# Altium PCB qfc_Alfa2.0.PcbDoc
Units mil, origin at the board's own origin, x right, y up, seen from the top; angles counter-clockwise.
Board outline 6000 x 4000 mil, 2 copper layers (Top Layer, Bottom Layer); 137 components, 138 nets, 616 pads, 0 vias.
Unrouted connection lines stored in the file: 431.
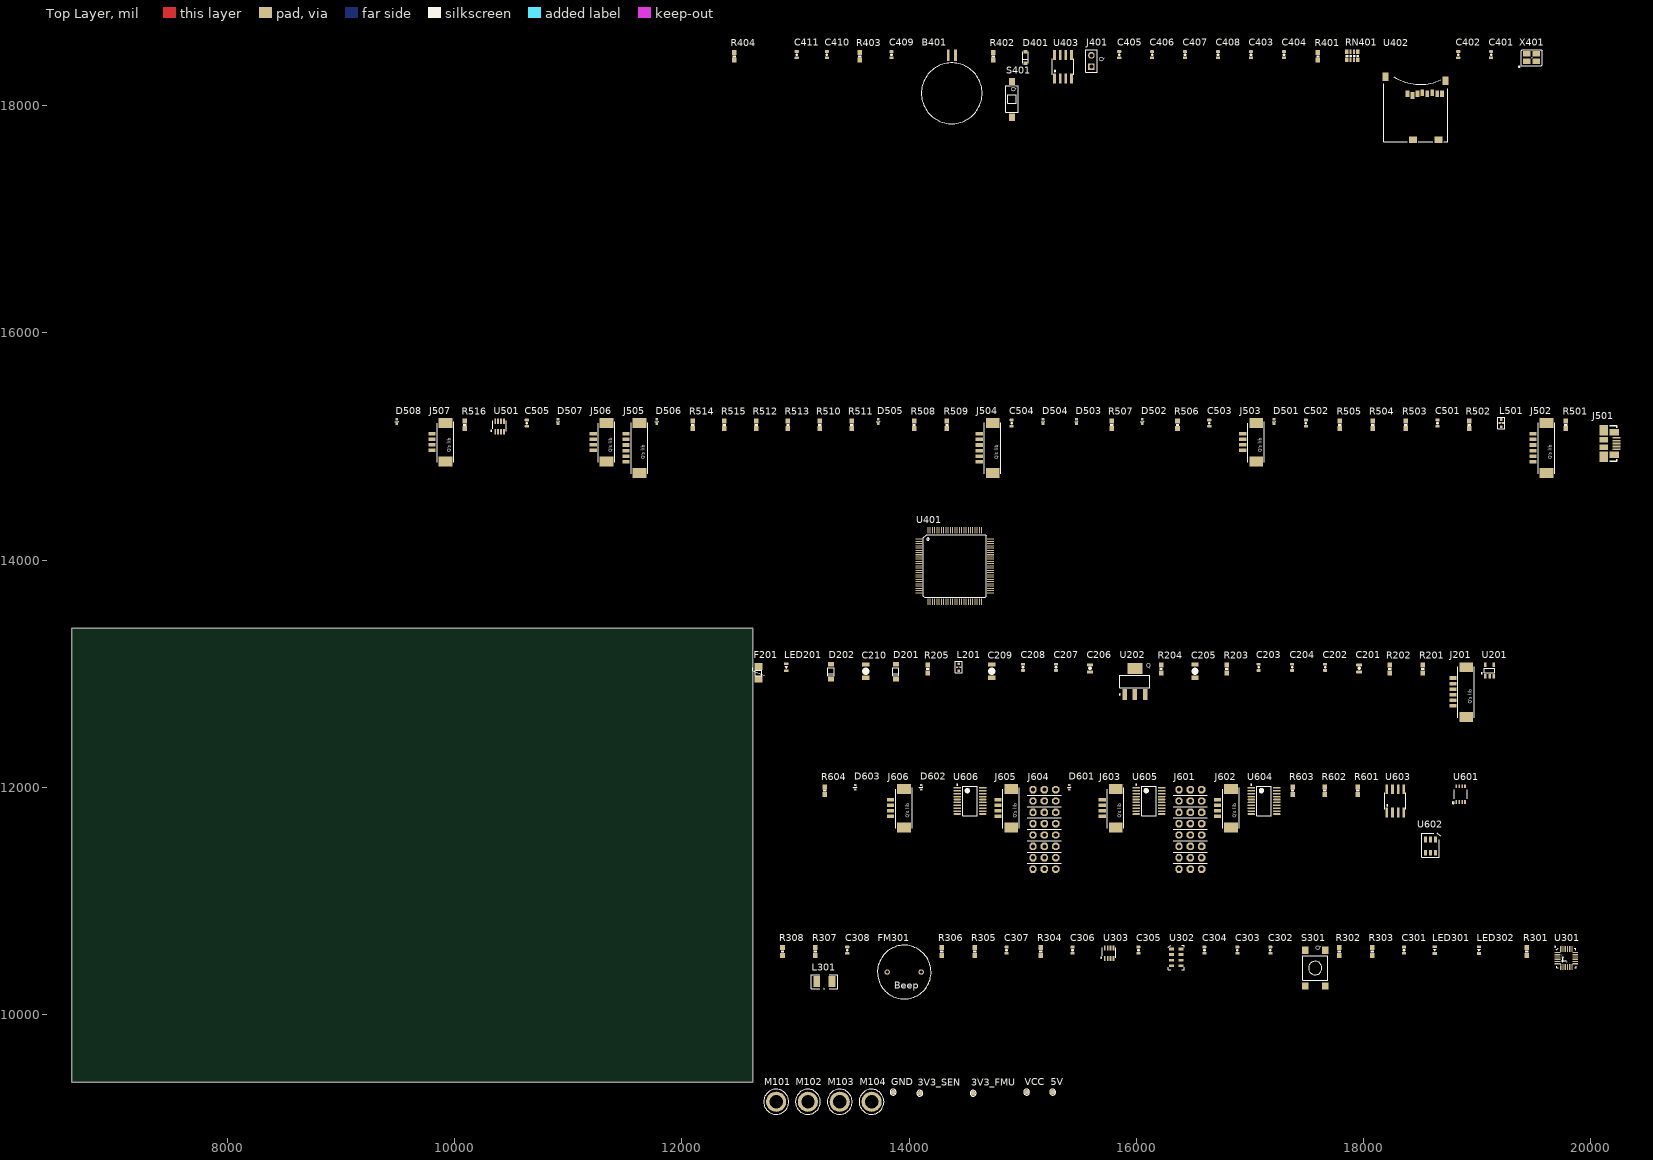
[diagram p0: Top Layer view]
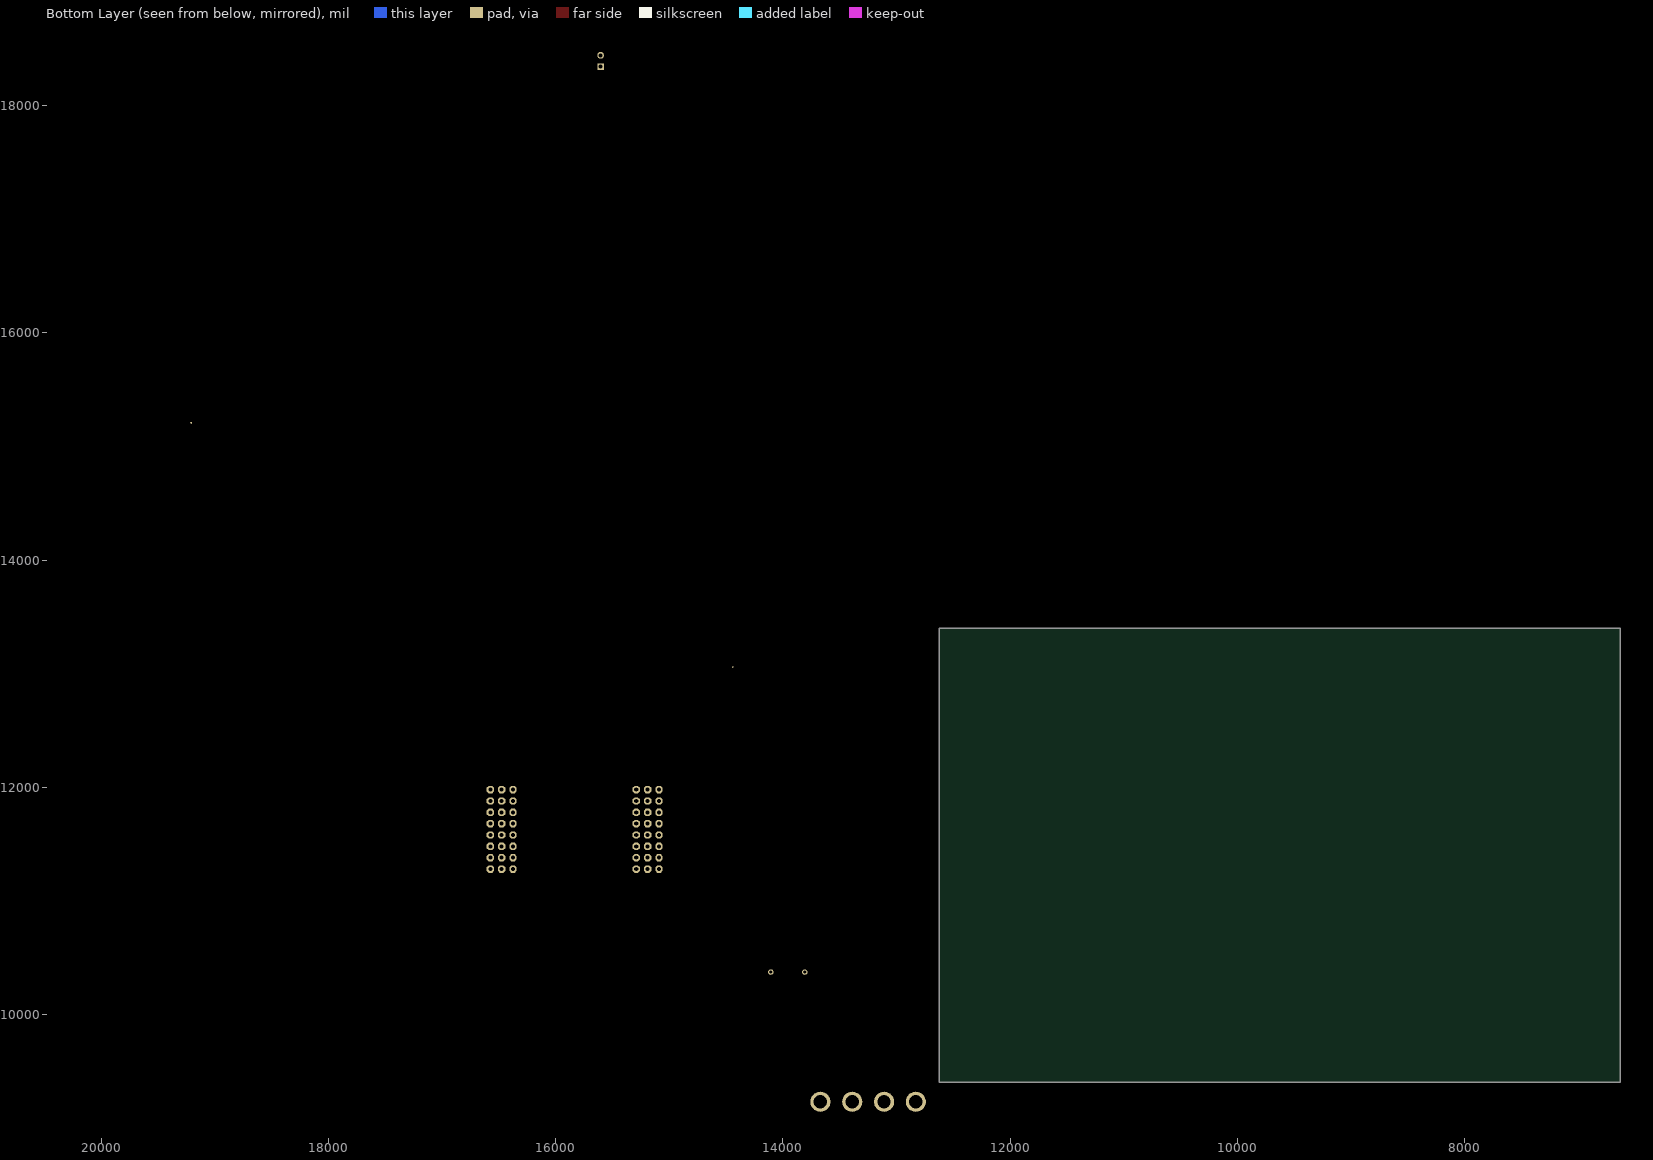
[diagram p1: Bottom Layer view, seen from below]

## Layer stack, top to bottom
Top Layer: signal copper 1.4
Dielectric: dielectric 12.6, FR-4, Dk 4.8
Bottom Layer: signal copper 1.4

## Board outline
6625,9400 12625,9400 12625,13400 6625,13400

## Design rules (kind name [scope] priority, off if disabled: settings)
Clearance [All] p1: gap=10
HoleSize [All] p1: absolutevalues=TRUE maxlimit=137.8 minlimit=1 maxpercent=80.000 minpercent=20.000
MinimumSolderMaskSliver [All] p1: minsoldermaskwidth=0
PolygonConnect [All] p1: connectstyle=Relief reliefconductorwidth=10 reliefentries=4 polygonreliefangle="90 Angle"
RoomDefinition U_sensors [InComponentClass('U_sensors')] p1: confinementstyle=ConfineIn formatcopy=TRUE lockcomponents=FALSE outline 12841,10125 19911,10125 19911,10719 12841,10719
RoomDefinition U_power [InComponentClass('U_power')] p2: confinementstyle=ConfineIn formatcopy=TRUE lockcomponents=FALSE outline 12614,12561 19259,12561 19259,13211 12614,13211
RoomDefinition U_con_3V3-5V [InComponentClass('U_con_3V3-5V')] p3: confinementstyle=ConfineIn formatcopy=TRUE lockcomponents=FALSE outline 13212,11224 19007,11224 19007,12139 13212,12139
RoomDefinition U_con_3V3 [InComponentClass('U_con_3V3')] p4: confinementstyle=ConfineIn formatcopy=TRUE lockcomponents=FALSE outline 9464,14711 20439,14711 20439,15361 9464,15361
RoomDefinition top [InComponentClass('top')] p5: confinementstyle=ConfineIn formatcopy=TRUE lockcomponents=FALSE outline 12705,9035 15365,9035 15365,9450 12705,9450
RoutingVias [All] p1: holewidth=28 width=50 viastyle="Through Hole" minholewidth=28 minwidth=50 maxholewidth=28 maxwidth=50
SilkscreenOverComponentPads [All] p1: minsilkscreentomaskgap=2
SolderMaskExpansion [All] p1: expansion=4
Width [All] p1: maxlimit=80 minlimit=10 preferedwidth=12
25 further rules are at their usual default settings.

## Classes and differential pairs
component class U_sensors: C301 C302 C303 C304 C305 C306 C307 C308 FM301 L301 LED301 LED302 R301 R302 R303 R304 R305 R306 R307 R308 S301 U301 U302 U303
component class U_power: C201 C202 C203 C204 C205 C206 C207 C208 C209 C210 D201 D202 F201 J201 L201 LED201 R201 R202 R203 R204 R205 U201 U202
component class U_fmu: B401 C401 C402 C403 C404 C405 C406 C407 C408 C409 C410 C411 D401 J401 R401 R402 R403 R404 RN401 S401 U401 U402 U403 X401
component class U_con_3V3: C501 C502 C503 C504 C505 D501 D502 D503 D504 D505 D506 D507 D508 J501 J502 J503 J504 J505 J506 J507 L501 R501 R502 R503 R504 R505 R506 R507 R508 R509 R510 R511 R512 R513 R514 R515 R516 U501
component class U_con_3V3-5V: D601 D602 D603 J601 J602 J603 J604 J605 J606 R601 R602 R603 R604 U601 U602 U603 U604 U605 U606
component class top: 3V3_FMU 3V3_SEN 5V GND M101 M102 M103 M104 VCC

## Components (designator, comment, footprint, x,y, rotation, side; value= is the part's Value field where it differs from the comment)
3V3_FMU "TEST" PAD.04X.04 14565,9305 r90 top
3V3_SEN "TEST" PAD.04X.04 14095,9305 r90 top
5V "TEST" PAD.04X.04 15265,9315 r0 top
B401 "MS621FE" MS621FE 14376,18110 r90 top
C201 "10u" 0805-CAP 17964,13046 r90 top
C202 "0u1" 0603-CAP 17664,13056 r90 top
C203 "10n" 0603-CAP 17079,13056 r90 top
C204 "0u1" 0603-CAP 17374,13056 r90 top
C205 "100u" 1206-CAP 16519,13021 r90 top
C206 "10u" 0805-CAP 15594,13046 r90 top
C207 "0u1" 0603-CAP 15294,13056 r90 top
C208 "0u1" 0603-CAP 15004,13056 r90 top
C209 "100u" 1206-CAP 14729,13021 r90 top
C210 "100u" 1206-CAP 13619,13021 r90 top
C301 "10n" 0603-CAP 18359,10565 r90 top
C302 "2u2" 0603-CAP 17182,10565 r90 top
C303 "0u1" 0603-CAP 16891,10565 r90 top
C304 "2u2" 0603-CAP 16601,10565 r90 top
C305 "0u1" 0603-CAP 16020,10565 r90 top
C306 "2u2" 0603-CAP 15440,10565 r90 top
C307 "0.47uF" 0603-CAP 14859,10565 r90 top
C308 "10n" 0603-CAP 13456,10565 r90 top
C401 "8pF" 0603-CAP 19126,18450 r90 top
C402 "8pF" 0603-CAP 18836,18450 r90 top
C403 "2u2" 0603-CAP 17011,18450 r90 top
C404 "2u2" 0603-CAP 17301,18450 r90 top
C405 "0u1" 0603-CAP 15851,18450 r90 top
C406 "0u1" 0603-CAP 16141,18450 r90 top
C407 "0u1" 0603-CAP 16431,18450 r90 top
C408 "0u1" 0603-CAP 16721,18450 r90 top
C409 "0u1" 0603-CAP 13846,18450 r90 top
C410 "0u1" 0603-CAP 13276,18450 r90 top
C411 "0u1" 0603-CAP 13011,18450 r90 top
C501 "0u1" 0603-CAP 18654,15206 r90 top
C502 "0u1" 0603-CAP 17494,15206 r90 top
C503 "0u1" 0603-CAP 16644,15206 r90 top
C504 "0u1" 0603-CAP 14904,15206 r90 top
C505 "0u1" 0603-CAP 10634,15206 r90 top
D201 "MBR120VLSFT3GOSCT" SOD-123LF 13884,13081 r90 top
D202 "MMSZ5233BT1G" SOD-123LF 13314,13081 r90 top
D401 "RB751V40T1G" SOD-323 15026,18425 r90 top
D501 "PESD0603-140" 0603-ESD 17214,15221 r90 top
D502 "PESD0603-140" 0603-ESD 16054,15221 r90 top
D503 "PESD0603-140" 0603-ESD 15474,15221 r90 top
D504 "PESD0603-140" 0603-ESD 15179,15221 r90 top
D505 "PESD0603-140" 0603-ESD 13729,15221 r90 top
D506 "PESD0603-140" 0603-ESD 11779,15221 r90 top
D507 "PESD0603-140" 0603-ESD 10909,15221 r90 top
D508 "PESD0603-140" 0603-ESD 9489,15221 r90 top
D601 "PESD0603-140" 0603-ESD 15412,11999 r90 top
D602 "PESD0603-140" 0603-ESD 14107,11999 r90 top
D603 "PESD0603-140" 0603-ESD 13527,11999 r90 top
F201 "0ZCA0035FF2G" 1206-FUSE 12674,13006 r90 top
FM301 "BEEP" BEEP-12mm 13733,10397 r0 top
GND "TEST" PAD.04X.04 13860,9315 r90 top
J201 "GH1.25-6P" 1.25-6P 18789,13011 r90 top
J401 "HDR 2X1" HDR2X1 15606,18345 r90 top
J501 "47346-0001" MOLEX-47346-0001 20119,15026 r0 top
J502 "GH1.25-6P" 1.25-6P 19494,15161 r90 top
J503 "GH1.25-4P" 1.25-4P 16939,15261 r90 top
J504 "GH1.25-6P" 1.25-6P 14619,15161 r90 top
J505 "GH1.25-6P" 1.25-6P 11509,15161 r90 top
J506 "GH1.25-4P" 1.25-4P 11219,15261 r90 top
J507 "GH1.25-4P" 1.25-4P 9799,15261 r90 top
J601 "JR 3X8" JR3X8 16577,11279 r90 top
J602 "GH1.25-4P" 1.25-4P 16717,12039 r90 top
J603 "GH1.25-4P" 1.25-4P 15702,12039 r90 top
J604 "JR 3X8" JR3X8 15292,11279 r90 top
J605 "GH1.25-4P" 1.25-4P 14782,12039 r90 top
J606 "GH1.25-4P" 1.25-4P 13837,12039 r90 top
L201 "KNH16C104DA5TS" 0603-KNH16-DA 14439,13056 r90 top
L301 "47uH" "1210 - IND" 13320,10380 r180 top
L501 "KNH16C104DA5TS" 0603-KNH16-DA 19214,15206 r90 top
LED201 "APG1608CGKC" 0603-LED 12919,13056 r90 top
LED301 "APT1608SECK" 0603-LED 18629,10565 r90 top
LED302 "APT1608QBC/G" 0603-LED 19019,10565 r90 top
M101 "MOUNT-HOLE3MM" HOLE-3mm 12830,9230 r0 top
M102 "MOUNT-HOLE3MM" HOLE-3mm 13110,9230 r0 top
M103 "MOUNT-HOLE3MM" HOLE-3mm 13390,9230 r0 top
M104 "MOUNT-HOLE3MM" HOLE-3mm 13670,9230 r0 top
R201 "10K 0.1%" 0603-RES 18524,13041 r90 top
R202 "10K 0.1%" 0603-RES 18234,13041 r90 top
R203 "10K 0.1%" 0603-RES 16799,13041 r90 top
R204 "10K 0.1%" 0603-RES 16219,13041 r90 top
R205 "1K" 0603-RES 14164,13041 r90 top
R301 "10K" 0603-RES 19439,10553 r90 top
R302 "220R" 0603-RES 17788,10553 r90 top
R303 "220R" 0603-RES 18078,10553 r90 top
R304 "16K5" 0603-RES 15159,10553 r90 top
R305 "453K" 0603-RES 14579,10553 r90 top
R306 "9K09" 0603-RES 14289,10553 r90 top
R307 "10K" 0603-RES 13176,10553 r90 top
R308 "100K" 0603-RES 12886,10553 r90 top
R401 "10K" 0603-RES 17601,18435 r90 top
R402 "10K" 0603-RES 14741,18435 r90 top
R403 "1K" 0603-RES 13566,18435 r90 top
R404 "10K" 0603-RES 12461,18435 r90 top
R501 "0R" 0603-RES 19784,15191 r90 top
R502 "10K" 0603-RES 18934,15191 r90 top
R503 "22R" 0603-RES 18374,15191 r90 top
R504 "10K" 0603-RES 18084,15191 r90 top
R505 "22R" 0603-RES 17794,15191 r90 top
R506 "120R" 0603-RES 16364,15191 r90 top
R507 "120R" 0603-RES 15784,15191 r90 top
R508 "10K 0.1%" 0603-RES 14044,15191 r90 top
R509 "10K 0.1%" 0603-RES 14334,15191 r90 top
R510 "10K 0.1%" 0603-RES 13214,15191 r90 top
R511 "10K 0.1%" 0603-RES 13494,15191 r90 top
R512 "10K 0.1%" 0603-RES 12654,15191 r90 top
R513 "10K 0.1%" 0603-RES 12934,15191 r90 top
R514 "10K 0.1%" 0603-RES 12094,15191 r90 top
R515 "10K 0.1%" 0603-RES 12374,15191 r90 top
R516 "120R" 0603-RES 10089,15191 r90 top
R601 "220R" 0603-RES 17952,11969 r90 top
R602 "220R" 0603-RES 17662,11969 r90 top
R603 "220R" 0603-RES 17377,11969 r90 top
R604 "10K" 0603-RES 13257,11969 r90 top
RN401 "10K" 0603*4 17856,18405 r90 top
S301 "SWITCH" SW_6*6 17571,10422 r90 top
S401 "轻触开关 贴片3*6*2.5mm" SMD-SWITCH-2P 14819,18058 r90 top
U201 "TPS79133" R-PDSO-G5 19449,12716 r0 top
U202 "LM1117S-3.3" SOT223-4N 15989,12931 r0 top
U301 "MPU-6000" QFN-24 19788,10495 r0 top
U302 "MS5611-01BA" MS5611-01BA 16353,10501 r0 top
U303 "LT3469" SOT23-8 15762,10537 r0 top
U401 "STM32F427VI qfp 100 pin" LQFP100 14403,13948 r0 top
U402 "2908-05WB-MG" MICROSD 18466,18000 r0 top
U403 "RAM-FM25V01" SO08 15356,18345 r0 top
U501 "3.3-V CAN TRANSCEIVER" SOT23-8 10394,15176 r0 top
U601 "Dual inverter tri-state, 3.3V/5V" TSSOP8_SOT505-2 18857,11939 r0 top
U602 "LRTB GFTG-T7AW-1+V7A7-29+R5T9-49-L" P-LCC-6 18580,11480 r90 top
U603 "TM1803" SO08 18282,11879 r0 top
U604 "TXS0108EPWR" SOP65P640-20N 17127,11879 r0 top
U605 "TXS0108EPWR" SOP65P640-20N 16112,11879 r0 top
U606 "TXS0108EPWR" SOP65P640-20N 14537,11879 r0 top
VCC "TEST" PAD.04X.04 15035,9315 r90 top
X401 "Crystal Oscillator in 3.2x2.5 SMD" 3225-OSC 19481,18425 r0 top

## Footprints (in the part's own frame and the unit in brackets; to place one, negate y for a bottom-side part, rotate by r counter-clockwise, add the part's x,y. Pads: shape width x height; smd on the part's side, far side on the other; paste and mask are expansions set on the pad)
1.25-4P [mm]
  rect 0.8x1.6 smd: 1(-7.5,0) 2(-6.25,0) 3(-5,0) 4(-3.75,0)
  rect 2.2x3.1 smd: GND(-9.982,-2.997) GND(-1.4,-3)
  silkscreen extent -10.16,-4.83 -1.14,-1.14
1.25-6P [mm]
  rect 0.8x1.6 smd: 1(-7.5,0) 2(-6.25,0) 3(-5,0) 4(-3.75,0) 5(-2.5,0) 6(-1.25,0)
  rect 2.2x3.1 smd: GND(-9.982,-2.997) GND(1.15,-3)
  silkscreen extent -10.16,-4.83 1.27,-1.14
0603*4 [mm] "Res Array 0603*4"
  rect 1.016x0.8 smd: 1(0,0) 4(0,-2.4) 5(1.778,-2.4) 8(1.778,0)
  rect 1.016x0.5 smd: 2(0,-0.8) 3(0,-1.6) 6(1.778,-1.6) 7(1.778,-0.8)
  silkscreen extent 0.66,-2.74 1.12,0.3, body extent 0.05,-2.82 1.75,0.39, height 0.67
0603-CAP [mil] "0603-CAP"
  rrect50% 24x36 smd mask+0: P$1(-27.56,0) P$2(27.56,0)
  silkscreen extent 0,-2 0,2, body extent -31,-16 31,16, height 34
0603-ESD [mil] "0603-TVS"
  rect 20x24 smd: A(20,0) C(-19.68,0)
  silkscreen extent -5,-16 3,16, body extent -20,-10 20,10, height 20
0603-KNH16-DA [mil] "EMI Filters, KYOCERA-KNH16-DA"
  rect 16x16 smd: GND(0,16) GND(0,-15.75)
  rect 16x16 hole 12: GND(0,0)
  rect 24x24 smd: P$1(-31.5,0) P$2(32,0)
  silkscreen extent -50,-30 51,31, body extent -20,-10 20,10, height 14
0603-LED [mil] "0603-LED_Blue"
  rect 24x36 smd: A(30,0) C(-29.53,0)
  silkscreen extent -11,-15 9,15, body extent -33,-18 33,18, height 35
0603-RES [mil] "0603-RES"
  rect 44x40 smd: 1(-33.46,0) 2(34,0)
  silkscreen extent -9,-15 9,15, body extent -33,-16 34,16, height 26
0805-CAP [mil]
  rrect50% 28x52 smd mask+0: P$1(-31.5,0) P$2(31.5,0)
  silkscreen extent 0,-2 0,2, body extent -39,-25 39,25, height 31
1206-CAP [mil]
  rect 36x63 smd: P$1(-57.09,0) P$2(58,0)
  silkscreen extent 0,0 0,1, body extent -54,-35 54,33, height 36
1206-FUSE [mil] "PTC-1206"
  rect 59.69x71 smd: 1(-55.12,0) 2(56,0)
  silkscreen extent -25,-50 45,50, body extent -60,-30 65,30, height 20
"1210 - IND" [mil] "贴片电感，绕线工字"
  rect 60x98.43 smd: 1(-3,90) 2(132,90)
  silkscreen extent -53,30 182,155, body extent -1,41 125,159, height 39
3225-OSC [mil] "OSCILLATOR-3.2X2.5mm"
  rect 66x48 smd: 1(-43.31,-33.46) 2(44,-33.46) 3(44,34) 4(-43.31,34)
  silkscreen extent -111,-85 96,71
BEEP-12mm [mm] "SOP封装，直径12mm"
  round 1.2 hole 0.7: 1(1.905,-0.635) 2(9.505,-0.635)
  silkscreen extent -0.28,-6.63 11.71,5.36, body extent -0.31,-6.52 11.7,5.5, height 10
HDR2X1 [mm]
  rect 1.5x1.5 hole 0.9: 1(-0.011,0.007)
  round 1.5 hole 0.9: 2(2.529,0.007)
  silkscreen extent -1.28,-1.26 3.8,1.28, body extent -1.27,-1.27 3.81,1.27, height 10
HOLE-3mm [mm] "Surface mount thread"
  round 4.5 hole 3: 0(0,0)
  silkscreen extent -2.79,-2.79 2.79,2.79, body extent -1.65,-1.83 1.53,1.83, height 2
JR3X8 [mil]
  oct 65x65 hole 35.43: 1(0,200) 2(100,200) 3(200,200) 4(300,200) 5(400,200) 6(500,200) 7(600,200) 8(700,200) GND(0,0) GND(100,0) GND(200,0) GND(300,0) GND(400,0) GND(500,0) GND(600,0) GND(700,0) VCC(0,100) VCC(100,100) VCC(200,100) VCC(300,100) VCC(400,100) VCC(500,100) VCC(600,100) VCC(700,100)
  silkscreen extent 50,-50 650,250, body extent -50,-50 750,250, height 394
LQFP100 [mil] "TQFP100"
  rect 60x9 smd: 1(-314.96,237) 2(-314.96,217) 3(-314.96,197) 4(-314.96,178) 5(-314.96,158) 6(-314.96,138) 7(-314.96,119) 8(-314.96,99) 9(-314.96,79) 12(-314.96,20) 13(-314.96,0) 14(-314.96,-19.68) 15(-314.96,-39.37) 16(-314.96,-59.06) 17(-314.96,-78.74) 18(-314.96,-98.43) 20(-314.96,-137.8) 21(-314.96,-157.48) 22(-314.96,-177.17) 23(-314.96,-196.85) 24(-314.96,-216.54) 25(-314.96,-236.22) 51(315,-236.22) 52(315,-216.54) 53(315,-196.85) 54(315,-177.17) 55(315,-157.48) 56(315,-137.8) 57(315,-118.11) 58(315,-98.43) 59(315,-78.74) 60(315,-59.06) 61(315,-39.37) 62(315,-19.68) 63(315,0) 64(315,20) 65(315,40) 66(315,60) 67(315,79) 68(315,99) 69(315,119) 70(315,138) 71(315,158) 72(315,178) 73(315,197) VDD(-314.96,-118.11) VDD(-314.96,40) VDD(315,237) VSS(-314.96,60) VSS(315,217)
  rect 9x60 smd: 26(-236.22,-314.96) 29(-177.17,-314.96) 30(-157.48,-314.96) 31(-137.8,-314.96) 32(-118.11,-314.96) 33(-98.43,-314.96) 34(-78.74,-314.96) 35(-59.06,-314.96) 36(-39.37,-314.96) 37(-19.68,-314.96) 38(0,-314.96) 39(20,-314.96) 40(40,-314.96) 41(60,-314.96) 42(79,-314.96) 43(99.01,-314.96) 44(119,-314.96) 45(138,-314.96) 46(158,-314.96) 47(178,-314.96) 48(197,-314.96) 49(217,-314.96) 76(237,315) 77(217,315) 78(197,315) 79(178,315) 80(158,315) 81(138,315) 82(119,315) 83(99,315) 84(79,315) 85(60,315) 86(40,315) 87(20,315) 88(0,315) 89(-19.68,315) 90(-39.37,315) 91(-59.06,315) 92(-78.74,315) 93(-98.43,315) 94(-118.11,315) 95(-137.8,315) 96(-157.48,315) 97(-177.17,315) 98(-196.85,315) VDD(-236.22,315) VDD(-196.85,-314.96) VDD(237,-314.96) VSS(-216.54,-314.96) VSS(-216.54,315)
  silkscreen extent -276,-276 276,276, body extent -315,-315 315,315, height 47
MICROSD [mil] "MICROSD"
  rect 32x60 smd: 1(-76.38,107) 2(-33.07,91) 3(11,107) 4(54,115) 5(97,107) 6(141,115) 7(184,107) 8(227,107)
  rect 56x75 smd: 6(-269.69,258) 6(258,219)
  rect 71x56 smd: 6(-29.53,-299.21) 6(195,-299.21)
  silkscreen extent -287,-315 276,256, body extent -276,-315 276,285, height 73
MOLEX-47346-0001 [mil]
  rect 70x15 smd: D+(111,0) D-(111,26) GND(111,-51.18) ID(111,-25.59) VBUS(111,52)
  rect 75x94 smd: GND1(0,117) GND4(0,-116.14)
  rect 80x55 smd: GND2(91,99) GND3(91,-98.43)
  rect 75x47 smd: GND5(0,-32.97) GND6(0,33)
  silkscreen extent 52,-157 111,158, body extent -94,-157 120,157, height 107
MS621FE [mm]
  rect 2.5x0.6 smd: +(8.509,0.775) -(8.509,-0.825)
  silkscreen extent -6.78,-6.8 6.81,6.8
MS5611-01BA [mil] "MS5611-01BA"
  rect 44x24 smd: 1(-43.31,74) 2(-43.31,25) 3(-43.31,-24.61) 4(-43.31,-73.82) 5(44,-73.82) 6(44,-24.61) 7(44,25) 8(44,74)
  silkscreen extent -69,-108 69,109, body extent -59,-98 59,99, height 39
P-LCC-6 [mm]
  rect 1.3x0.7 smd: A1(-1.467,-1.392) A1(-1.467,-1.392) A2(-1.467,-0.292) A3(-1.467,0.808) C1(1.483,-1.392) C2(1.483,-0.292) C3(1.483,0.808)
  silkscreen extent -2.49,-2.44 3.02,1.68, body extent -1.3,-1.82 1.22,1.27, height 1.5
PAD.04X.04 [mil]
  rrect100% 40x40 smd: P$1(0,0)
  silkscreen extent -26,-26 26,26
QFN-24 [mm] "QFN-24, 原有基础上加长，Q。"
  rect 1.321x0.25 smd: 1(-2,1.25) 2(-2,0.75) 3(-2,0.25) 4(-2,-0.25) 5(-2,-0.75) 6(-2,-1.25) 13(2.007,-1.25) 14(2.007,-0.75) 15(2.007,-0.25) 16(2.007,0.254) 17(2.007,0.762) 18(2.007,1.27)
  rect 0.25x1.321 smd: 7(-1.25,-2) 8(-0.75,-2) 9(-0.25,-2) 10(0.254,-2) 11(0.762,-2) 12(1.27,-2) 19(1.27,2.007) 20(0.762,2.007) 21(0.254,2.007) 22(-0.25,2.007) 23(-0.75,2.007) 24(-1.25,2.007)
  silkscreen extent -2.62,-2.15 2.18,2.64, body extent -2,-2 2,2, height 0.9
R-PDSO-G5 [mm]
  rect 0.6x1 smd: 1(-9.5,6.65) 2(-8.55,6.65) 3(-7.6,6.65) 4(-7.6,9.25) 5(-9.5,9.25)
  silkscreen extent -10.41,7.14 -7.37,8.46, body extent -10.1,6.86 -6.92,9.02, height 1
SMD-SWITCH-2P [mm] "3*6*2.5mm 轻触开关"
  rect 1.6x1.4 smd: 1(3.998,-2.244) 2(-4.012,-2.244)
  silkscreen extent -2.93,-3.61 3.04,-0.81, body extent -4.57,-3.75 4.57,-0.72, height 4.57
SO08 [mil] "SO08"
  rect 24x87 smd: 1(-75,-103) 2(-25,-103) 3(25,-103) 4(75,-103) 5(75,103) 6(25,103) 7(-25,103) 8(-75,103)
  silkscreen extent -93,-71 93,71, body extent -96,-121 96,121
SOD-123LF [mm] "pad 4.3*1.3mm, fit 3.8*1.8 componets"
  rect 1x1.3 smd: A(0,0) C(-3.36,0)
  silkscreen extent -2.54,-0.7 -0.76,0.71, body extent -2.9,-0.62 -0.4,0.63, height 0.9
SOD-323 [mm] "pad 3.3*0.83mm, fit 2.7*1.4mm componets"
  rect 0.83x0.83 smd: A(1.27,0) C(-1.25,0)
  silkscreen extent -1.55,-0.65 1.3,0.79, body extent -1.25,-0.62 1.25,0.63, height 0.9
SOP65P640-20N [mm] "SOP, 20-Leads, Body 6.5x4.4mm, Pitch 0.65mm, IPC Medium Density"
  oval 1.7x0.35 smd: 1(-2.85,2.925) 2(-2.85,2.275) 3(-2.85,1.625) 4(-2.85,0.975) 5(-2.85,0.325) 6(-2.85,-0.325) 7(-2.85,-0.975) 8(-2.85,-1.625) 9(-2.85,-2.275) 10(-2.85,-2.925) 11(2.85,-2.925) 12(2.85,-2.275) 13(2.85,-1.625) 14(2.85,-0.975) 15(2.85,-0.325) 16(2.85,0.325) 17(2.85,0.975) 18(2.85,1.625) 19(2.85,2.275) 20(2.85,2.925)
  silkscreen extent -2.97,-3.3 1.6,3.77, body extent -2.25,-3.3 2.25,3.3, height 2
SOT23-8 [mil] "SOT23-8"
  rect 15x45 smd: 1(-38.39,-46.26) 2(-12.8,-46.26) 3(13,-46.26) 4(39,-46.26) 5(39,47) 6(13,47) 7(-12.8,47) 8(-38.39,47)
  silkscreen extent -76,-41 60,51, body extent -59,-55 59,55, height 44
SOT223-4N [mm] "SOT223, 4-Leads, Body 6.5x3.5mm, Pitch 2.3mm, Lead Span 7mm, IPC Medium Density"
  rect 1x2.4 smd: 1(-2.3,-2.9) 2(0,-2.9) 3(2.3,-2.9)
  rect 3.3x2.4 smd: 4(0,2.9)
  silkscreen extent -3.47,-3.02 3.35,1.4, body extent -3.35,-1.85 3.35,1.85, height 1.8
SW_6*6 [mm] "6.5*6.5MM"
  rect 1.6x1.4 smd: 1(-4.379,2.092) 2(3.631,2.092) 3(-4.379,-2.398) 4(3.631,-2.398)
  silkscreen extent -3.15,-3 2.41,2.67, body extent -4.95,-3.31 4.19,3, height 4.57
TSSOP8_SOT505-2 [mil] "TSSOP8_SOT505-2"
  rect 14x34 smd: 1(-38.39,-69.88) 2(-12.8,-69.88) 3(13,-69.88) 4(39,-69.88) 5(39,70) 6(13,70) 7(-12.8,70) 8(-38.39,70)
  silkscreen extent -73,-85 58,40, body extent -61,-81 61,81, height 43

## Part data
B401: library part BAT-MS621FE, "MS Lithium Rechargeable Battery"
C201 C206: library part CAP0805-10uF, "Capacitor, 10uF, 10V, Y5V, 0805, Ceramic"
C202 C204 C207 C208 C303 C305 C405 C406 C407 C408 C409 C410 C411 C501 C502 C503 C504 C505: library part CAP0603-0.1uF, "Capacitor, 0.1uF, 16V, Y5V, 0402, Ceramic"
C203 C301 C308: library part CAP0603-10nF, "Capacitor, 10nF, 50V"
C205 C209 C210: library part CAP1206-100uF, "CAP CER 100UF 10V 20% X5R 1206"
C302 C304 C306 C403 C404: library part CAP0603-2.2uF, "Capacitor, 2.2uF, 16V, 10%, X6S, 0603, Ceramic"
C307: library part CAP0603-0.47uF, "Capacitor, 0.47uF, 16V, 10%, X6S, 0603, Ceramic"
C401 C402: library part CAP0603-8pF, "CAP CER 8PF 50v c0g 0603"
D201: library part DIODE-SBD_SOD123FL, "DIODE SCHOTTKY 20V 1A , 0.34V, SOD123FL"
D202: library part DIODE-ZENER, "DIODE ZENER 6V 500MW SOD123"
D401: library part DIODE-SBD_SOD323, "DIODE SCHOTTKY 40V 30mA , 0.34V, SOD323"
D501 D502 D503 D504 D505 D506 D507 D508 D601 D602 D603: library part DIODE-ESD, "TVS DIODE 14V 0603"
F201: library part FUSE-1206, "PTC RESTTBLE 0.35A 16V CHIP 1206, 自恢复保险"
FM301: "蜂鸣器"
J201 J502 J503 J504 J505 J506 J507 J602 J603 J605 J606: "GH1.25mm 立贴 间距1.25mm 连接器贴片"
J401: "排针, 2X1 pins"
J501: library part MicroUSB, "MICRO USB B, BOTTOM MOUNT"
J601 J604: "Header 3X8 pins"
L201 L501: library part "EMI Filters", "EMI FILTER CAP 0.1UF 2A 25V 0603"
L301: library part INDUCTOR-1210, "贴片功率电感，绕线工字电感"
LED201: library part LED0603-GREEN, "2.1v, LED GREEN CLEAR 0603 SMD"
LED301: library part LED0603-RED, "2.2v, LED RED CLEAR 0603 SMD"
LED302: library part LED0603-BLUE, "3.3v, LED BLUE CLEAR 0603 SMD"
R201 R202 R203 R204 R508 R509 R510 R511 R512 R513 R514 R515: library part RES0603-10k_0.1%, "RES 10 OHM 1/10W 0.1% 0603"
R205 R403: library part RES0603-1K, "RES 1K OHM 1/10W 5% 0603"
R301 R307 R401 R402 R404 R502 R504 R604: library part RES0603-10K, "RES 10K OHM 1/10W 5% 0603"
R302 R303 R601 R602 R603: library part RES0603-220R, "RES 220R OHM 1/10W 5% 0603"
R304: library part RES0603-16K5, "RES 16K5 OHM 1/10W 5% 0603"
R305: library part RES0603-453K, "RES 453K OHM 1/10W 5% 0603"
R306: library part RES0603-9K09, "RES 9K09 OHM 1/10W 5% 0603"
R308: library part RES0603-100K, "RES 100K OHM 1/10W 5% 0603"
R501: library part RES0603-0R, "RES 0R OHM 1/10W 5% 0603"
R503 R505: library part RES0603-22R, "RES 22R OHM 1/10W 5% 0603"
R506 R507 R516: library part RES0603-120R, "RES 120R OHM 1/10W 5% 0603"
RN401: library part RES4P-0603-10K, "RES ARRAY 10K OHM 4 RES 0603"
S301: "6*6*4.3 微动轻触开关贴片"
S401: library part SWITCH-1, "按键 3*6*2.5mm 轻触开关 贴片2脚 白色"
U201: library part LDO-TPS79133
U202: library part LDO-LM1117S-3.3, "LDO, ouput 3.3V/1A, 0.04% Line Regulation and 0.1% load Regulation."
U301: "GYRO/ACCELEROMETER 6AXIS 24QFN"
U302: "Board Mount Pressure Sensors"
U303: "IC AMP DVR W/REG 1.3MHZ TSOT23-8"
U401: library part STM32F4X7VX, "REV 3 Silicon or later IC MCU ARM 2MB FLASH 100LQFP"
U402: library part MICROSD-SDI, "CONN MICRO SD CARD PUSH-PUSH R/A"
U403: "IC FRAM 128KBIT 40MHZ 8SOIC"
U501: library part MAX3051, "IC TXRX CAN 1MBPS SOT23-8"
U601: library part 74LVC2G240-TSSOP-8, "IC INVERTER DUAL 4-INPUT 8TSSOP"
U602: library part LED-RGB, "Muti LEDs"
U603: library part LED_DRV-TM1803, "3-Channel Constant-Current LED Driver"
U604 U605 U606: "IC XLATR VOLT-LVL 8B BDIR 20QFN"
X401: library part OSCILLATOR-3225, "CRYSTAL 24MHZ 8PF SMD"

## Nets (pads, with @x,y where several pads share a name; then routed paths per layer and width w, separated by ;. In a path a pad name is that pad's centre, name@x,y a point inside that pad or via, vN(x,y) a via of type N, cw(c..) or ccw(c..) an arc to the next point about the centre after c; other vN are vias at no path point)
3V3_FMU: 3V3_FMU.P$1 C208.P$1 C209.P$1 C405.P$1 C406.P$1 C407.P$1 C408.P$1 C409.P$1 C411.P$1 D401.A J401.2 R301.2 R401.1 R402.1 R502.2 R504.2 RN401.5 RN401.6 RN401.7 RN401.8 U202.2 U202.4 U401.21 U401.22 U401.VDD U402.4 U403.3 U403.7 U403.8 U601.8 U604.2 U604.10 U605.2 U605.10 U606.2
3V3_SEN: 3V3_SEN.P$1 C204.P$1 C205.P$1 C303.P$1 C304.P$1 C305.P$1 U201.5 U301.13 U302.1
5V: 5V.P$1 C306.P$1 C505.P$1 D201.A D502.C D505.C D507.C D508.C D601.C D602.C D603.C J201.3 J201.4 J502.5 J503.3 J505.5 J507.3 J601.VCC J602.3 J603.3 J604.VCC J605.3 J606.3 L301.1 R501.1 U303.3 U501.3 U602.A1 U602.A2 U602.A3 U603.8 U604.19 U605.19 U606.19
!FRAM_CS: U403.1
!SBUS_OUTPUT: U601.3 U606.9
FRAM_MISO: U401.54 U403.2
FRAM_MOSI: U401.53 U403.5
FRAM_SCK: U401.52 U403.6
GND: B401.- C201.P$1 C201.P$2 C202.P$1 C202.P$2 C203.P$2 C204.P$2 C205.P$2 C206.P$1 C206.P$2 C207.P$1 C207.P$2 C208.P$2 C209.P$2 C210.P$1 C210.P$2 C301.P$2 C302.P$2 C303.P$2 C304.P$2 C305.P$2 C307.P$2 C308.P$2 C401.P$2 C402.P$1 C403.P$2 C404.P$2 C405.P$2 C406.P$2 C407.P$2 C408.P$2 C409.P$2 C410.P$2 C411.P$2 C501.P$2 C502.P$2 C503.P$2 C504.P$2 C505.P$2 D202.A D501.A D502.A D503.A D504.A D505.A D506.A D507.A D508.A D601.A D602.A D603.A FM301.2 GND.P$1 J201.5 J201.6 J201.GND J501.GND J501.GND1 J501.GND2 J501.GND3 J501.GND4 J502.6 J502.GND J503.4 J503.GND J504.6 J504.GND J505.6 J505.GND J506.4 J506.GND J507.4 J507.GND J601.GND J602.4 J602.GND J603.4 J603.GND J604.GND J605.4 J605.GND J606.4 J606.GND L201.GND L201.P$2 L501.GND L501.P$1 LED301.C LED302.C R203.1 R204.1 R205.2 R305.2 R307.2 R404.2 R508.1 R510.1 R512.1 R514.1 S301.3 S301.4 S401.2 U201.1 U201.2 U201.3 U202.1 U202.3 U301.1 U301.18 U302.2 U302.3 U303.4 U401.20 U401.VSS U402.6 U403.4 U501.2 U501.5 U501.8 U601.1 U601.4 U603.4 U604.11 U605.11 U606.11 VCC.P$1 X401.2 X401.4
I2C1_SCK-5V: U603.6 U604.13
I2C1_SDA-5V: U603.5 U604.12
NetC203_P$1: C203.P$1 U201.4
NetC301_P$1: C301.P$1 U301.20
NetC302_P$1: C302.P$1 U301.10
NetC306_P$2: C306.P$2 L301.2 U303.5
NetC307_P$1: C307.P$1 R304.1 U303.6
NetC308_P$1: C308.P$1 FM301.1 R308.1 U303.1
NetC401_P$1: C401.P$1 U401.12 X401.3
NetC402_P$2: C402.P$2 U401.13 X401.1
NetC403_P$1: C403.P$1 U401.49
NetC404_P$1: C404.P$1 U401.73
NetC410_P$1: C410.P$1 R402.2 S401.1 U401.14
NetC501_P$1: C501.P$1 R514.2 R515.2 U401.17
NetC502_P$1: C502.P$1 R508.2 R509.2 U401.18
NetC503_P$1: C503.P$1 R510.2 R511.2 U401.33
NetC504_P$1: C504.P$1 R512.2 R513.2 U401.34
NetD201_C: D201.C F201.1
NetD202_C: D202.C F201.2 L201.P$1
NetD401_C: D401.C R403.2
NetD501_C: D501.C J501.VBUS R501.2 U401.68
NetD503_C: D503.C J501.D+ R505.2
NetD504_C: D504.C J501.D- R503.2
NetD506_C: D506.C J504.5 L501.P$2 R515.1
NetJ201_1: J201.1 R201.1
NetJ201_2: J201.2 R202.1
NetJ401_1: J401.1 R404.1 U401.94
NetJ502_1: J502.1 U401.98
NetJ502_2: J502.2 U401.5
NetJ502_3: J502.3 U401.4
NetJ502_4: J502.4 U401.1
NetJ503_1: J503.1 R506.2
NetJ503_2: J503.2 R507.2
NetJ504_1: J504.1 R509.1
NetJ504_2: J504.2 R511.1
NetJ504_3: J504.3 R513.1
NetJ505_2: J505.2 U401.76
NetJ505_3: J505.3 U401.89
NetJ505_4: J505.4 U401.72
NetJ506_1: J506.1 U401.7
NetJ506_2: J506.2 U401.8
NetJ506_3: J506.3 U401.9
NetJ507_1: J507.1 R516.2 U501.7
NetJ507_2: J507.2 R516.1 U501.6
NetJ601_1: J601.1 U604.20
NetJ601_2: J601.2 U604.18
NetJ601_3: J601.3 U604.17
NetJ601_4: J601.4 U604.16
NetJ602_1: J602.1 U401.29
NetJ604_1: J604.1 U605.20
NetJ604_2: J604.2 U605.18
NetJ604_3: J604.3 U605.17
NetJ604_4: J604.4 U605.16
NetJ604_5: J604.5 U605.15
NetJ604_6: J604.6 U605.14
NetJ604_7: J604.7 U605.13
NetJ604_8: J604.8 U605.12
NetLED301_A: LED301.A R302.2
NetLED302_A: LED302.A R303.2
NetR201_2: R201.2 R204.2 U401.15
NetR202_2: R202.2 R203.2 U401.16
NetR301_1: R301.1 S301.1 S301.2 U401.97
NetR302_1: R302.1 U401.88
NetR303_1: R303.1 U401.85
NetR304_2: R304.2 R305.1 U303.2
NetR306_1: R306.1 U303.7
NetR306_2: R306.2 U401.77
NetR307_1: R307.1 R308.2 U303.8
NetR502_1: R502.1 R506.1 U401.47
NetR503_1: R503.1 U401.70
NetR504_1: R504.1 R507.1 U401.48
NetR505_1: R505.1 U401.71
NetR601_1: R601.1 U603.1
NetR601_2: R601.2 U602.C1
NetR602_1: R602.1 U603.2
NetR602_2: R602.2 U602.C2
NetR603_1: R603.1 U603.3
NetR603_2: R603.2 U602.C3
NetR604_1: R604.1 U401.64
NetU301_8: U301.8 U401.58
NetU302_5: U302.5 U401.57
NetU401_23: U401.23 U606.7
NetU401_24: U401.24 U606.6
NetU401_25: U401.25 U604.7
NetU401_26: U401.26 U604.6
NetU401_35: U401.35 U605.4
NetU401_36: U401.36 U605.5
NetU401_40: U401.40 U604.1
NetU401_42: U401.42 U604.3
NetU401_44: U401.44 U604.4
NetU401_45: U401.45 U604.5
NetU401_55: U401.55 U606.5
NetU401_56: U401.56 U606.4
NetU401_59: U401.59 U605.6
NetU401_60: U401.60 U605.7
NetU401_61: U401.61 U605.8
NetU401_62: U401.62 U605.9
NetU401_81: U401.81 U501.4
NetU401_82: U401.82 U501.1
NetU401_84: U401.84 U601.7
NetU401_86: U401.86 U601.5
NetU401_87: U401.87 U601.6
NetU401_90: U401.90 U605.1
NetU401_91: U401.91 U605.3
NetU401_92: U401.92 U606.3
NetU401_93: U401.93 U606.1
NetU401_95: U401.95 U604.8
NetU401_96: U401.96 U604.9
PPM/SBUS_5V: J601.8 U606.13
PPM_INPUT: U401.63 U601.2 U606.8
SBUSOUT_5V: J601.7 R604.2 U606.12
SDIO_CK: U401.80 U402.5
SDIO_CMD: RN401.3 U401.83 U402.3
SDIO_D0: RN401.4 U401.65 U402.7
SDIO_D1: R401.2 U401.66 U402.8
SDIO_D2: RN401.1 U401.78 U402.1
SDIO_D3: RN401.2 U401.79 U402.2
SONAR-ECHO5V: J602.2 U604.14
SPI1_MISO: U301.9 U302.6 U401.30
SPI1_MOSI: U301.24 U302.7 U401.32
SPI1_SCK: U301.23 U302.8 U401.31
TIM2_CH4_5V: J601.6 U604.15
UART1_RX: J605.1 U606.20
UART1_TX: J605.2 U606.18
UART3_RX: J603.1 U606.17
UART3_TX: J603.2 U606.16
UART4_RX: J606.1 U606.15
UART4_TX: J606.2 U606.14
VBAT: B401.+ R403.1 U401.6
pads on no net: J501.GND5 J501.GND6 J501.ID J504.4 J505.1 J601.5 LED201.A LED201.C M101.0 M102.0 M103.0 M104.0 R205.1 U301.2 U301.3 U301.4 U301.5 U301.6 U301.7 U301.11 U301.12 U301.14 U301.15 U301.16 U301.17 U301.19 U301.21 U301.22 U302.4 U401.2 U401.3 U401.37 U401.38 U401.39 U401.41 U401.43 U401.46 U401.51 U401.67 U401.69 U603.7 U606.10

## Text inside footprints (layer, text, board x,y; h text height)
FM301: Top Overlay "Beep" at 13868,10227 h60
J201: Top Overlay "Q's lib" at 18954,12736 h30 r90
J401: Top Overlay "Q" at 15714,18387 h40 r90
J502: Top Overlay "Q's lib" at 19659,14886 h30 r90
J503: Top Overlay "Q's lib" at 17105,14951 h30 r90
J504: Top Overlay "Q's lib" at 14784,14886 h30 r90
J505: Top Overlay "Q's lib" at 11674,14886 h30 r90
J506: Top Overlay "Q's lib" at 11385,14951 h30 r90
J507: Top Overlay "Q's lib" at 9965,14951 h30 r90
J602: Top Overlay "Q's lib" at 16883,11729 h30 r90
J603: Top Overlay "Q's lib" at 15868,11729 h30 r90
J605: Top Overlay "Q's lib" at 14948,11729 h30 r90
J606: Top Overlay "Q's lib" at 14003,11729 h30 r90
L301: Top Overlay "Q" at 13261,10231 h10 r180
S301: Top Overlay "Q" at 17619.4,10565.4 h40 r90
S401: Top Overlay "Q" at 14939,18125 h40 r90
U202: Top Overlay "Q" at 16089,13051 h40
U301: Top Overlay "X" at 19800,10468 h10.2 r180; Top Overlay "Y" at 19745,10508 h10.2; Top Overlay "Z" at 19744.69,10451.69 h10.2 r180
U402: Mechanical 30 "card OUT" at 18414.82,18457 h49.6; Mechanical 30 "card IN" at 18438.44,18308 h49.6